# EAGLE board CC_SegmentoD (EAGLE 9.7.0)

Size 183.78 x 108.31 mm. Coordinates in mm from the lower left corner, seen from the top.
Outline: 0,0 183.78,0 183.78,108.31 0,108.31 0,0
Copper layers (1*16): Top 0.035mm / dielectric 1.5mm / Bottom 0.035mm
Design rules "default": minimum track width 6mil, minimum drill 0.35mm, track to track 6mil, track to pad 6mil, pad to pad 6mil, via to via 6mil, smd to smd 6mil, copper to edge 40mil, drill to drill 6mil, minimum pad ring 10mil, minimum via ring 8mil, stop-mask expansion 4mil, vias tented up to drill 0mil, thermal gap 10mil

## Footprints (pad centres in the part's own frame; a part is rotated, then mirrored left to right if it is on the bottom)
BATTERY-GENERIC = drill 1.118 pad 3.15 octagon: + 2.54,0; - -2.54,0
LEDRD254W60D565H860B = drill 0.981 pad 1.581: 1 -1.27,0; 2 1.27,0
RESAD1016W63L850D250B = drill 0.83 pad 1.43: 1 -5.08,0; 2 5.08,0
78B04ST = drill 0.8: 1 -3.81,-3.81; 2 -1.27,-3.81; 3 1.27,-3.81; 4 3.81,-3.81; 5 3.81,3.81; 6 1.27,3.81; 7 -1.27,3.81; 8 -3.81,3.81
TO92 = drill 0.813 octagon: 1 -1.27,0; 2 0,1.905; 3 1.27,0

## Placement (x,y rotation side)
BAT8  4.5V  [BATTERY-GENERIC]  8.26,98.25 270 top
D1  RED  [LEDRD254W60D565H860B]  174.13,39.45 0 top
R4  1k  [RESAD1016W63L850D250B]  167.78,31.83 0 top
R5  10k  [RESAD1016W63L850D250B]  119.03,79.02 90 top
R6  500  [RESAD1016W63L850D250B]  162.7,24.21 90 top
R7  10k  [RESAD1016W63L850D250B]  131.73,79.02 90 top
R8  10k  [RESAD1016W63L850D250B]  38.24,24.21 90 top
R9  10k  [RESAD1016W63L850D250B]  48.4,24.21 90 top
R10  10k  [RESAD1016W63L850D250B]  58.56,24.21 90 top
R11  1k  [RESAD1016W63L850D250B]  61.1,8.97 270 top
R12  10k  [RESAD1016W63L850D250B]  146.97,79.02 90 top
R13  10k  [RESAD1016W63L850D250B]  159.67,79.02 90 top
R14  10k  [RESAD1016W63L850D250B]  169.83,79.02 90 top
R15  1k  [RESAD1016W63L850D250B]  177.45,99.34 90 top
R16  10k  [RESAD1016W63L850D250B]  139.84,26.75 90 top
R17  10k  [RESAD1016W63L850D250B]  150,26.75 90 top
R18  10k  [RESAD1016W63L850D250B]  160.16,26.75 90 top
R46  200  [RESAD1016W63L850D250B]  47.91,79.02 90 top
R47  1k  [RESAD1016W63L850D250B]  50.45,79.02 90 top
R48  200  [RESAD1016W63L850D250B]  63.15,79.02 90 top
R49  1k  [RESAD1016W63L850D250B]  65.69,79.02 90 top
R50  200  [RESAD1016W63L850D250B]  78.39,79.02 90 top
R51  1k  [RESAD1016W63L850D250B]  80.93,79.02 90 top
R52  1k  [RESAD1016W63L850D250B]  96.17,79.02 90 top
R53  200  [RESAD1016W63L850D250B]  93.63,79.02 90 top
SW6  SPST-478B04ST  [78B04ST]  33.94,80.29 0 top
T1  NPN  [TO92]  131.73,89.18 0 top
T2  NPN  [TO92]  119.03,89.18 0 top
T3  NPN  [TO92]  160.16,34.37 0 top
T4  NPN  [TO92]  150,34.37 0 top
T5  NPN  [TO92]  139.84,34.37 0 top
T6  NPN  [TO92]  38.24,16.59 0 top
T7  NPN  [TO92]  48.4,16.59 0 top
T8  NPN  [TO92]  58.56,16.59 0 top
T9  NPN  [TO92]  146.97,89.18 0 top
T10  NPN  [TO92]  159.67,89.18 0 top
T11  NPN  [TO92]  169.83,89.18 0 top
T23  NPN  [TO92]  50.45,91.72 0 top
T27  NPN  [TO92]  65.69,89.18 0 top
T28  NPN  [TO92]  80.93,86.64 0 top
T29  NPN  [TO92]  96.17,86.64 0 top

## Library data of the parts
BAT8 R4-R18 R46-R53 SW6 = Tinkercad
D1 = Tinkercad; CATEGORY: Opto-Electronic; SUB-CATEGORY: LED; VALUE: LED_RED
T1-T11 T23 T27-T29 = Tinkercad; CATEGORY: Transistor; SUB-CATEGORY: BJT; TYPE: NPN

## Nets
BAT8+: BAT8.+ R46.1 R48.1 R50.1 R53.1 SW6.5 SW6.6 SW6.7 SW6.8 T1.1 T2.1 T5.1 T6.1 T7.1 T8.1 T9.1 T10.1 T11.1
BAT8-: BAT8.- D1.2 R6.1 R11.2 R15.2 T23.3 T27.3 T28.3 T29.3
D1_A: D1.1 R4.2
SW6_1: R8.2 R47.1 SW6.1
SW6_2: R49.1 SW6.2
SW6_3: R51.1 SW6.3
SW6_4: R14.1 R52.1 SW6.4
T1_B: R7.2 T1.2
T2_B: R5.2 T2.2
T2_E: R17.1 T1.3 T2.3
T3_B: R18.2 T3.2
T3_E: R4.1 R6.2 T3.3
T4_B: R17.2 T4.2
T4_E: T3.1 T4.3
T5_B: R16.2 T5.2
T5_E: T4.1 T5.3
T6_B: R8.1 T6.2
T6_E: R11.1 R18.1 T6.3 T7.3 T8.3
T7_B: R9.1 T7.2
T8_B: R10.1 T8.2
T9_B: R12.2 T9.2
T9_E: R15.1 R16.1 T9.3 T10.3 T11.3
T10_B: R13.2 T10.2
T11_B: R14.2 T11.2
T23_B: R47.2 T23.2
T23_C: R12.1 R46.2 T23.1
T27_B: R49.2 T27.2
T27_C: R5.1 R9.2 R13.1 R48.2 T27.1
T28_B: R51.2 T28.2
T28_C: R7.1 R50.2 T28.1
T29_B: R52.2 T29.2
T29_C: R10.2 R53.2 T29.1

## Tracks (layer width: path | path; a pad name or v marks a point on that pad's centre or on a via)
BAT8+  (17 unrouted)
BAT8-  (8 unrouted)
D1_A  (1 unrouted)
SW6_1  (2 unrouted)
SW6_2  (1 unrouted)
SW6_3  (1 unrouted)
SW6_4  (2 unrouted)
T1_B  (1 unrouted)
T2_B  (1 unrouted)
T2_E  (2 unrouted)
T3_B  (1 unrouted)
T3_E  (2 unrouted)
T4_B  (1 unrouted)
T4_E  (1 unrouted)
T5_B  (1 unrouted)
T5_E  (1 unrouted)
T6_B  (1 unrouted)
T6_E  (4 unrouted)
T7_B  (1 unrouted)
T8_B  (1 unrouted)
T9_B  (1 unrouted)
T9_E  (4 unrouted)
T10_B  (1 unrouted)
T11_B  (1 unrouted)
T23_B  (1 unrouted)
T23_C  (2 unrouted)
T27_B  (1 unrouted)
T27_C  (4 unrouted)
T28_B  (1 unrouted)
T28_C  (2 unrouted)
T29_B  (1 unrouted)
T29_C  (2 unrouted)